# Altium PCB MX2.PcbDoc
Units mil, origin at the board's own origin, x right, y up, seen from the top; angles counter-clockwise.
Board outline 1085.59 x 835 mil, 2 copper layers (Top Layer, Bottom Layer), stack 12.8 mil thick; 34 components, 19 nets, 103 pads, 80 vias.
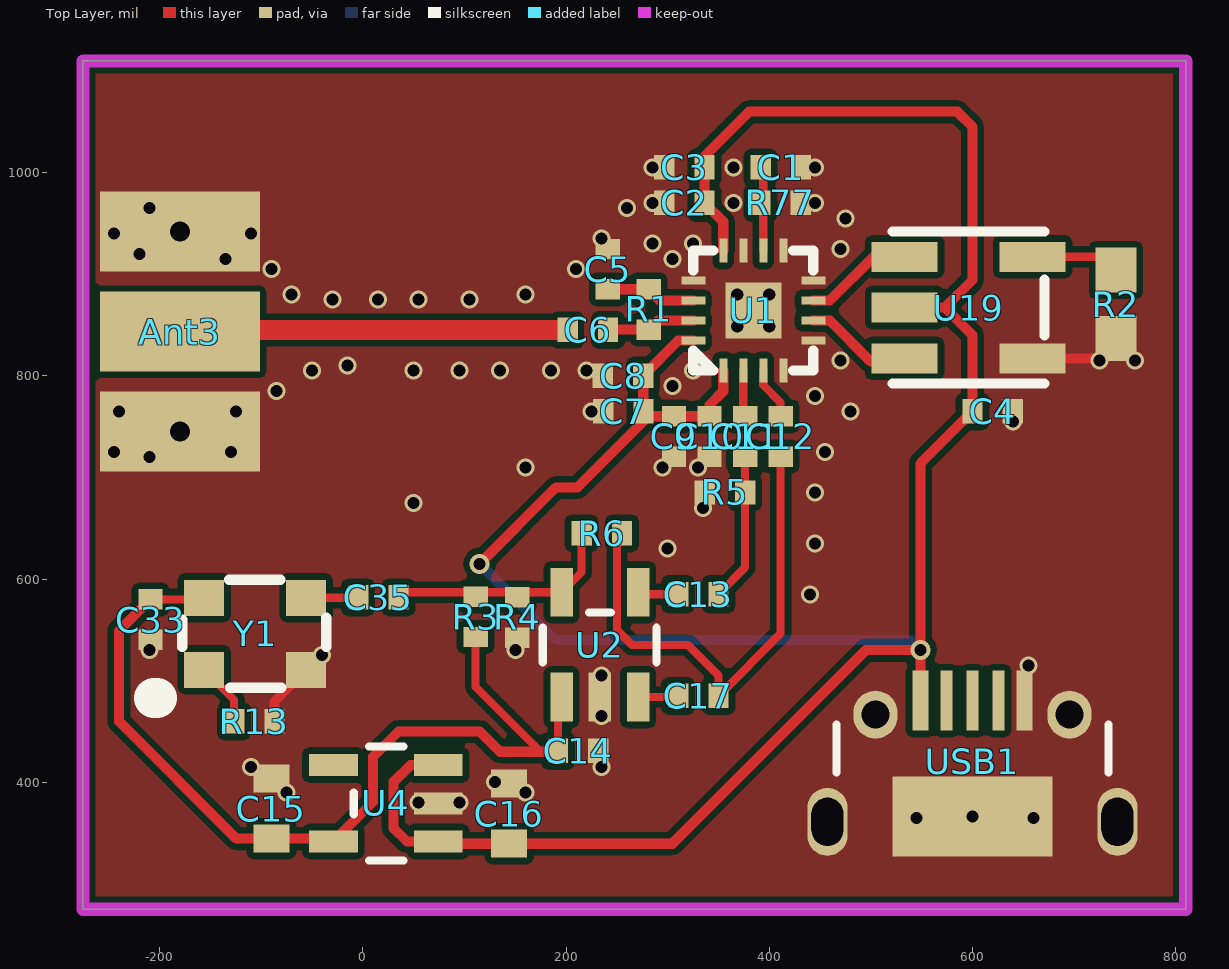
[diagram p0: Top Layer view]
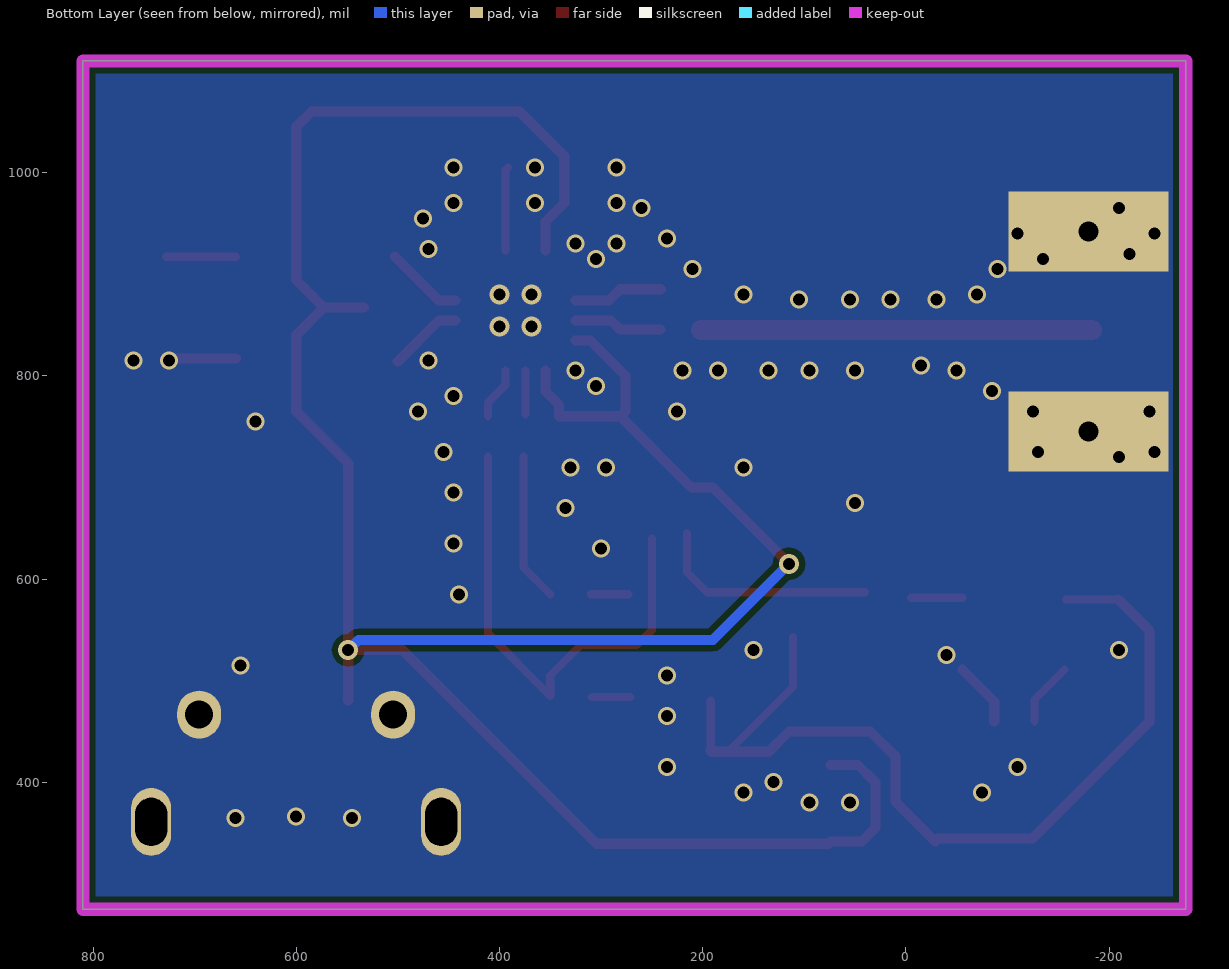
[diagram p1: Bottom Layer view, seen from below]

## Layer stack, top to bottom
Top Solder: solder mask 0.4, Solder Resist, Dk 3.8
Top Layer: signal copper 1.4
Dielectric 1: core 10, Dk 4.2
Bottom Layer: signal copper 1.4
Bottom Solder: solder mask 0.4, Solder Resist, Dk 3.8

## Board outline
-275.59,275 -275.59,1110 810,1110 810,275

## Design rules (kind name [scope] priority, off if disabled: settings)
Clearance 50R [InNetClass('50R') vs InPolygon] p1: gap=15 ignorepadtopadclearanceinfootprint=FALSE
Clearance [All] p2: gap=6 ignorepadtopadclearanceinfootprint=FALSE except(0: Arc-Hole Track-Hole SMDPad-Hole THPad-Hole Via-Hole Fill-Hole Poly-Hole Region-Hole Text-Hole)
DiffPairsRouting [All] p1: maxlimit=10 minlimit=10 mostfreqgap=10 toplayer_minwidth=5.98 toplayer_maxwidth=15 toplayer_prefwidth=15 bottomlayer_minwidth=5.98 bottomlayer_maxwidth=15 bottomlayer_prefwidth=15 maxuncoupledlength=500
MinimumSolderMaskSliver [All] p1 off: minsoldermaskwidth=10
PlaneClearance [All] p1: clearance=15
PlaneConnect [All] p1: planeconnectstyle=Direct reliefexpansion=20 reliefentries=4 reliefconductorwidth=10 reliefairgap=10
PolygonConnect [All] p1: connectstyle=Direct reliefconductorwidth=10 reliefentries=4 polygonreliefangle="90 Angle" airgapwidth=10
RoomDefinition MX [InComponentClass('MX')] p1 off: confinementstyle=ConfineIn formatcopy=TRUE lockcomponents=FALSE outline 749.04,1557.09 9899.04,1557.09 9899.04,1907.09 749.04,1907.09
RoutingVias [All] p1: holewidth=12 width=20 viastyle="Through Hole" minholewidth=11.81 minwidth=19.68 maxholewidth=28 maxwidth=50
SilkToBoardRegionClearance [All] p1 off:
SilkToSilkClearance [All] p1 off: silktosilkclearance=10
SilkToSolderMaskClearance [IsPad] p1 off: minsilkscreentomaskgap=10 clearancetoexposedcopper=TRUE
SolderMaskExpansion [All] p1: expansion=4
Width [All] p1: maxlimit=60 minlimit=6 preferedwidth=6
23 further rules are at their usual default settings.

## Components (designator, comment, footprint, x,y, rotation, side; value= is the part's Value field where it differs from the comment)
Ant3 "Antenna" SMA -180,745 r90 top
C1 "100pF" 0402 411.21,1005.17 r0 top
C2 "1nF" 0402 316.21,970.17 r0 top
C3 "1nF" 0402 316.21,1005.17 r0 top
C4 "1nF" 0402 620,765 r180 top
C5 "1nF" 0402 241.21,905.17 r270 top
C6 "1nF" 0402 221.21,845.17 r0 top
C7 "1nF" 0402 256.21,765.17 r0 top
C8 "1nF" 0402 256.21,800.17 r180 top
C9 "1nF" 0402 306.21,740.17 r90 top
C10 "1nF" 0402 341.21,740.17 r90 top
C11 "1nF" 0402 376.21,740.17 r90 top
C12 "1nF" 0402 411.21,740.17 r90 top
C13 "1nF" 0402 330,585 r0 top
C14 "0.1uF" 0402 212,431 r180 top
C15 "4.7uF" 0603L -90,374 r270 top
C16 "4.7uF" 0603L 144,369 r270 top
C17 "1nF" 0402 330,485 r0 top
C33 "0.1uF" 0402 -209,560 r90 top
C35 "0.1uF" 0402 15,582 r0 top
R1 "100" 0402 281.21,865.17 r90 top
R2 "200" 0603 741.21,870.17 r90 top
R3 "10k" 0402 111,563 r270 top
R4 "10k" 0402 152,562 r90 top
R5 "0R/NC" 0402 356.21,685.17 r0 top
R6 "NC" 0402 235,645 r0 top
R13 "NC" 0402 -107,460 r0 top
R77 "1.82k" 0402 411.21,970.17 r180 top
U1 "AD8342" ADA4932-1 384.25,864.25 r90 top
U2 "SN65LVDS1" SOT23-5 233,535 r0 top
U4 "LP5907" SOT23-5 23,379 r90 top
U19 "TCM1-13MX+" TCM-13M+ 596.21,867.17 r90 top
USB1 "USB Micro Type B" MICRO-YZX 600,250 r0 top
Y1 "OSC_40M" TXC_7Q -105.96,546.09 r0 top

## Footprints (in the part's own frame and the unit in brackets; to place one, negate y for a bottom-side part, rotate by r counter-clockwise, add the part's x,y. Pads: shape width x height; smd on the part's side, far side on the other; paste and mask are expansions set on the pad)
0402 [mil] "0402-RES"
  rect 20x24 smd: 1(-19.68,0) 2(20,0)
0603 [mil] "0603-RES"
  rect 44x40 smd: 1(-33.46,0) 2(34,0)
  body extent -31,-16 31,16, height 31
0603L [mm]
  rect 0.7x0.9 smd: 1(-0.75,0) 2(0.75,0)
  body extent -0.8,-0.4 0.8,0.4, height 0.8
ADA4932-1 [mm]
  rect 1.4x1.4 smd: 0(0,0)
  rect 0.6x0.2 smd: 1(-1.5,0.75) 2(-1.5,0.25) 3(-1.5,-0.25) 4(-1.5,-0.75) 9(1.5,-0.75) 10(1.5,-0.25) 11(1.5,0.25) 12(1.5,0.75)
  rect 0.2x0.6 smd: 5(-0.75,-1.5) 6(-0.25,-1.5) 7(0.25,-1.5) 8(0.75,-1.5) 13(0.75,1.5) 14(0.25,1.5) 15(-0.25,1.5) 16(-0.75,1.5)
  silkscreen extent -1.5,-1.5 1.5,1.5, body extent -1.5,-1.5 1.5,1.5, height 0.7
MICRO-YZX [mm]
  rect 0.4x1.5 smd: 1(-1.3,5.85) 5(1.3,5.85)
  rect 0.3x1.5 smd: 2(-0.65,5.85) 3(0,5.85) 4(0.65,5.85)
  oval 1x1.7 hole 0.8 slot 1.2 at 90 deg: 5(-3.625,2.82) 5(3.625,2.82)
  oval 1.1x1.2 hole 0.7: 5(-2.425,5.5) 5(2.425,5.5)
  rect 4x2 smd: 5(0,2.95)
  silkscreen extent -3.4,4.05 3.4,5.25, body extent -4.02,0.33 3.98,5.93, height 2.6
SMA [mm]
  rect 2x4 smd: 1(2.5,0)
  rect 2x4 hole 0.5: GND(0,0) GND(5,0)
SOT23-5 [mil] "SOT23-5"
  rect 22x48 smd: 1(-37.4,-51.19) 2(0,-51.19) 3(38,-51.19) 4(38,52) 5(-37.4,52)
  silkscreen extent -56,-17 56,32, body extent -57,-55 57,55, height 47
TCM-13M+ [mm]
  rect 0.75x1.65 smd: 1(-1.27,1.6) 2(0,1.6) 3(1.27,1.6) 4(1.27,-1.6) 5(-1.27,-1.6)
  silkscreen extent -1.9,-1.9 1.9,1.9
TXC_7Q [mm]
  rect 1x0.9 smd: 1(-1.275,-0.9) 2(1.275,-0.9) 3(1.275,0.9) 4(-1.275,0.9)
  silkscreen extent -2.52,-1.6 1.78,1.35

## Part data
C1 C2 C3 C4 C5 C6 C7 C8 C9 C10 C11 C12 C13 C14 C17 C33 C35: library part CAP0402-CAP, "<b>Capacitor</b> / Standard 0603 ceramic capacitor, and 0.1\" leaded capacitor.", PARTNO=CC0402ZRY5V7BB104
C15 C16: library part Cap, "Capacitor", LatestRevisionDate=17-Jul-2002, LatestRevisionNote="Re-released for DXP Platform.", PackageDescription="Radial Cap, Thru-Hole; 2 Leads; 0.3 in Pin Spacing", PackageReference=RAD-0.3, Published=8-Jun-2000, Publisher="Altium Limited"
R1 R2 R3 R4 R5 R6 R13 R77: library part Res2, "Resistor", LatestRevisionDate=17-Jul-2002, LatestRevisionNote="Re-released for DXP Platform.", PackageDescription="Axial Device, Thru-Hole; 2 Leads; 0.4 in Pin Spacing", PackageReference=AXIAL-0.4, Published=8-Jun-2000, Publisher="Altium Limited"
U19: library part TCM-63AX+
USB1: library part USB_Micro_TypeB, "Connector SMD USB Micro Type B middle mount", Manufacturer 1="Molex Inc", Manufacturer Part Number 1=47491-0001, Package / Case=SMD, Supplier Part Number 1=WM17142CT-ND, SCDType=undef, Supplier 1=Digi-Key

## Via types
v1: diameter 17.72, hole 11.81, Top Layer to Bottom Layer, 74 vias
v2: diameter 20, hole 12, Top Layer to Bottom Layer, 4 vias
v3: diameter 19.68, hole 11.81, Top Layer to Bottom Layer, 2 vias

## Nets (pads, with @x,y where several pads share a name; then routed paths per layer and width w, separated by ;. In a path a pad name is that pad's centre, name@x,y a point inside that pad or via, vN(x,y) a via of type N, cw(c..) or ccw(c..) an arc to the next point about the centre after c; other vN are vias at no path point)
3.3: C14.2 C15.2 C33.2 R3.2 U2.1 U4.5 Y1.4 | length 950.1
  Top Layer w8: C33.2 Y1.4@-157.68,580 ; R3.2 111,494 174,431 C14.2 U2.1@192,480.22
  Top Layer w10: C33.2 -240,549 -240,460 -124.47,344.47 C15.2 -31.87,344.47 U4.5 10,380.6 10,425 35,450 115,450 135,430 191,430 C14.2
5V: C2.2 C3.2 C4.2 C7.2 C8.1 C9.2 C10.2 C16.2 U1.1 U1.12 U1.16 U4.1 U4.3 U19.2 USB1.1 | length 2645.9
  Top Layer w10: U4.1 43.4,341.6 30,355 30,400 47,417 U4.3 ; U4.1@76.31,339.47 C16.2 304.47,339.47 495,530 v3(548.82,530) ; v3(115,615) 190,690 211.05,690 C7.2@281.21,760.17 ; U1.16 310.46,834.72 C8.1 275.9,765.48 C7.2 C7.2@281.21,760.17 ; U1.1 354.72,784.72 341.21,771.21 C10.2 C9.2 C7.2@281.21,760.17 ; U1.12 354.72,951.65 C2.2 C3.2 336.21,1016.21 380,1060 585,1060 600,1045 600,894.33 572.83,867.17 ; U19.2 572.83,867.17 ; USB1.1 v3(548.82,530) ; v3(548.82,530) 548.82,713.82 C4.2 600,840 572.83,867.17
  Bottom Layer w10: v3(115,615) 190,540 538.82,540 v3(548.82,530)
GND: Ant3.GND C1.2 C2.1 C3.1 C4.1 C5.1 C7.1 C8.2 C9.1 C10.1 C14.1 C15.1 C16.1 C33.1 R2.1 R4.1 R5.1 R13.2 R77.1 U1.0 U1.4 U1.5 U1.8 U1.9 U1.11 U1.13 U2.2 U4.2 U19.5 USB1.5 Y1.2 | length 126.1
  Top Layer w10: R13.2 -87,479.42 Y1.2 ; U19.5 R2.1@721.68,817.17
  other v1: 545,365 660,365 600,366.14 55,380 95,380 -75,390 160,390 130,400 -110,415 235,415 235,465 235,505 655,515 -40,525 -210,530 150,530 440,585 300,630 445,635 335,670 50,675 445,685 160,710 295,710 330,710 -210,720 -245,725 -130,725 455,725 640,755 -240,765 -125,765 225,765 480,765 445,780 -85,785 305,790 -50,805 50,805 95,805 135,805 185,805 220,805 325,805 -15,810 470,815 725,815 760,815 -30,875 15,875 55,875 105,875 -70,880 160,880 -90,905 210,905 -135,915 305,915 -220,920 470,925 285,930 325,930 235,935 -245,940 -110,940 475,955 -210,965 260,965 285,970 365,970 445,970 285,1005 365,1005 445,1005
  other v2: 368.5,848.5 400,848.5 368.5,880 400,880
NetAnt3_1: Ant3.1 C6.1 | length 387.2
  Top Layer w15: Ant3.1@-185,843.43 Ant3.1@-183.26,845.17
  Top Layer w20: Ant3.1@-183.26,845.17 C6.1
NetC1_1: C1.1 R77.2 U1.10 | length 82.9
  Top Layer w8: C1.1 394.09,1002.6 U1.10
NetC5_2: C5.2 R1.2 U1.14 | length 88.6
  Top Layer w10: C5.2 R1.2 292.28,874.09 U1.14
NetC6_2: C6.2 R1.1 U1.15 | length 87.4
  Top Layer w10: C6.2@241.53,845.48 R1.1 290.14,854.41 U1.15
NetC11_1: C11.1 C13.2 R5.2 | length 146.3
  Top Layer w8: C13.2 376.21,611.21 R5.2 C11.1
NetC11_2: C11.2 U1.2 | length 43.2
  Top Layer w8: C11.2@374.41,761.97 U1.2
NetC12_1: C12.1 C17.2 R6.2 | length 489.5
  Top Layer w8: R6.2@250,640 250,550 265,535 320,535 350,505 C17.2 411.21,546.21 C12.1
NetC12_2: C12.2 U1.3 | length 52.1
  Top Layer w8: U1.3 394.09,790.91 411.21,773.79 C12.2
NetC13_1: C13.1 U2.4 | length 37.3
  Top Layer w8: U2.4@273,585 C13.1
NetC17_1: C17.1 U2.3 | length 38.1
  Top Layer w8: U2.3 C17.1@309.13,483.81
NetC35_1: C35.1 Y1.3 | length 50.6
  Top Layer w8: Y1.3 C35.1@-5.17,581.52
NetC35_2: C35.2 R3.1 R4.2 R6.1 U2.5 | length 221.8
  Top Layer w8: C35.2@40,587 U2.5 215.32,606.72 R6.1
NetR2_2: R2.2 U19.4 | length 69
  Top Layer w8: U19.4 R2.2@728.21,917.17
NetR13_1: R13.1 Y1.1 | length 62.9
  Top Layer w8: Y1.1 -126.68,481.18 R13.1
NetU1_6: U1.6 U19.1 | length 73.4
  Top Layer w10: U1.6 459.6,854.41 500,814.01
NetU1_7: U1.7 U19.3 | length 77.3
  Top Layer w10: U1.7 459.68,874.09 U19.3@502.75,917.17
pads on no net: U4.4 USB1.2 USB1.3 USB1.4

## Polygon pours and split planes (outlines as drawn)
GND on Bottom Layer "GND_L02_P000" (solid, remove dead copper, pour order 0): -275.59,275 810,275 810,1110 -275.59,1110
GND on Top Layer "GND_L01_P002" (solid, remove dead copper, pour order 2): -275.59,275 810,275 810,1110 -275.59,1110

## Keep-outs
Keep-Out Layer:
  the board outline again, w13